# Altium PCB S24-footprint.pcbdoc
Units mm, origin at the board's own origin, x right, y up, seen from the top; angles counter-clockwise.
Board outline 51.95 x 43.98 mm, 2 copper layers (Top Layer, Bottom Layer); 1 components, 0 nets, 30 pads, 0 vias.
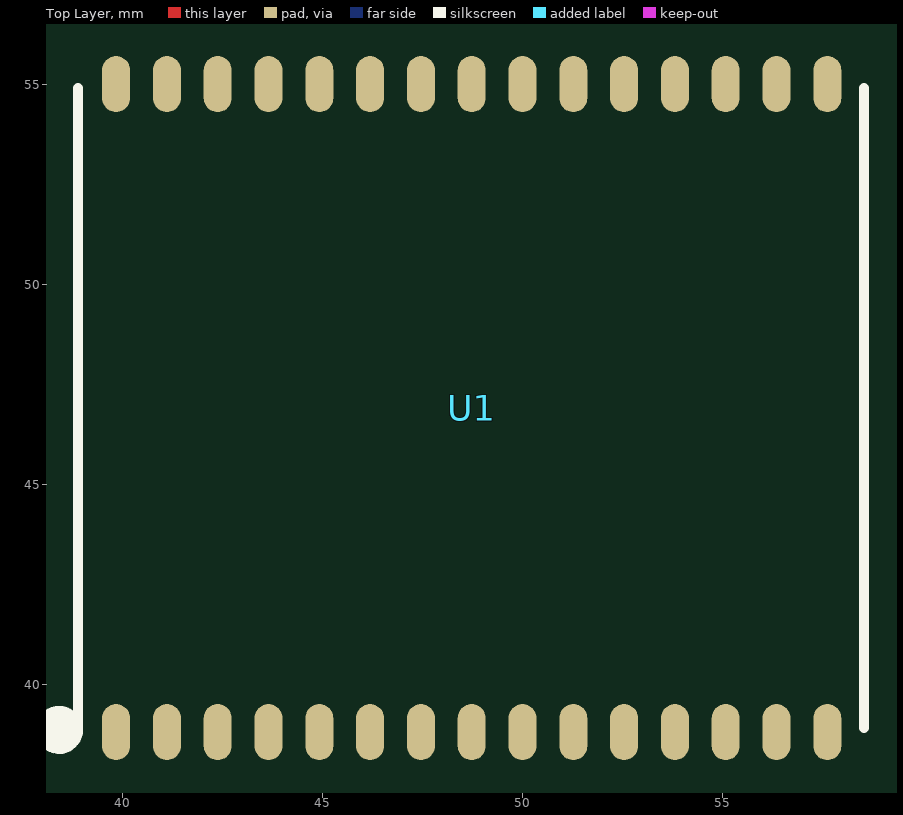
[diagram p0: Top Layer view]
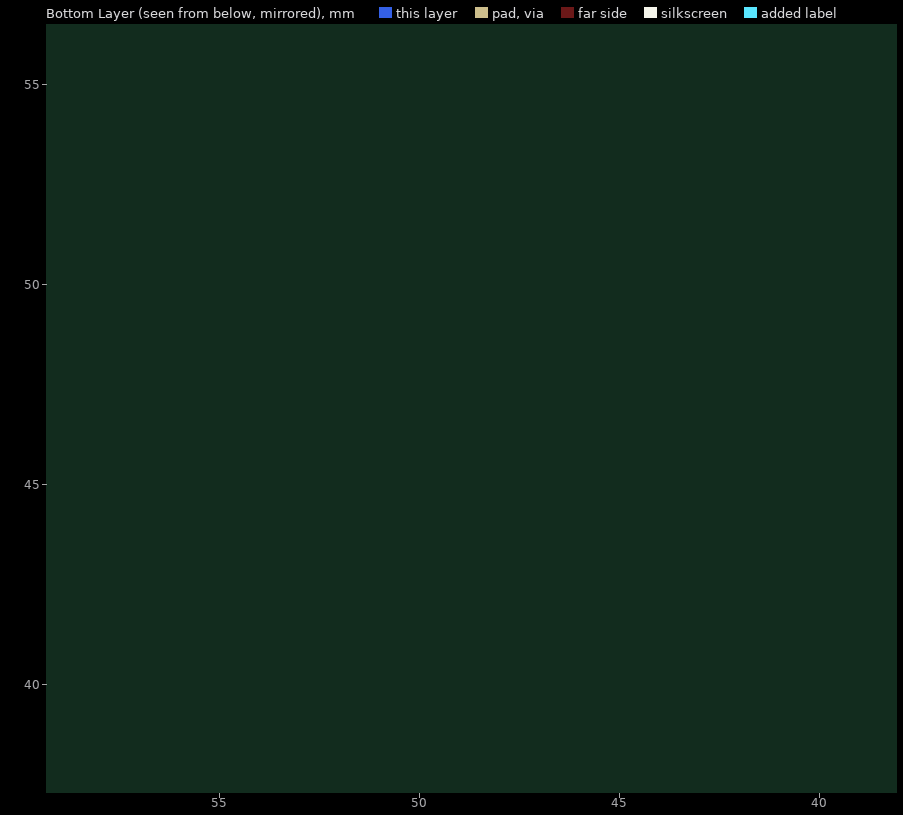
[diagram p1: Bottom Layer view, seen from below]

## Layer stack, top to bottom
Top Layer: signal copper (thickness not stored)
Dielectric: dielectric 0.32, FR-4, Dk 4.8
Bottom Layer: signal copper (thickness not stored)

## Board outline
77.355,25.4 25.4,25.4 25.4,69.382 77.355,69.382

## Components (designator, comment, footprint, x,y, rotation, side; value= is the part's Value field where it differs from the comment)
U1 "S24-PAD" S24-PAD 48.718,46.9 r0 top

## Footprints (in the part's own frame and the unit in brackets; to place one, negate y for a bottom-side part, rotate by r counter-clockwise, add the part's x,y. Pads: shape width x height; smd on the part's side, far side on the other; paste and mask are expansions set on the pad)
S24-PAD [mm]
  oval 0.7x1.4 smd: 1(-8.89,-8.1) 2(-7.62,-8.1) 3(-6.35,-8.1) 4(-5.08,-8.1) 5(-3.81,-8.1) 6(-2.54,-8.1) 7(-1.27,-8.1) 8(0,-8.1) 9(1.27,-8.1) 10(2.54,-8.1) 11(3.81,-8.1) 12(5.08,-8.1) 13(6.35,-8.1) 14(7.62,-8.1) 15(8.89,-8.1) 16(8.89,8.1) 17(7.62,8.1) 18(6.35,8.1) 19(5.08,8.1) 20(3.81,8.1) 21(2.54,8.1) 22(1.27,8.1) 23(0,8.1) 24(-1.27,8.1) 25(-2.54,8.1) 26(-3.81,8.1) 27(-5.08,8.1) 28(-6.35,8.1) 29(-7.62,8.1) 30(-8.89,8.1)
  silkscreen extent -10.62,-8.35 9.81,8

## Nets (pads, with @x,y where several pads share a name; then routed paths per layer and width w, separated by ;. In a path a pad name is that pad's centre, name@x,y a point inside that pad or via, vN(x,y) a via of type N, cw(c..) or ccw(c..) an arc to the next point about the centre after c; other vN are vias at no path point)
pads on no net: U1.1 U1.2 U1.3 U1.4 U1.5 U1.6 U1.7 U1.8 U1.9 U1.10 U1.11 U1.12 U1.13 U1.14 U1.15 U1.16 U1.17 U1.18 U1.19 U1.20 U1.21 U1.22 U1.23 U1.24 U1.25 U1.26 U1.27 U1.28 U1.29 U1.30